# EAGLE board TUR8535 com mae - V1.01 (EAGLE 4.09)
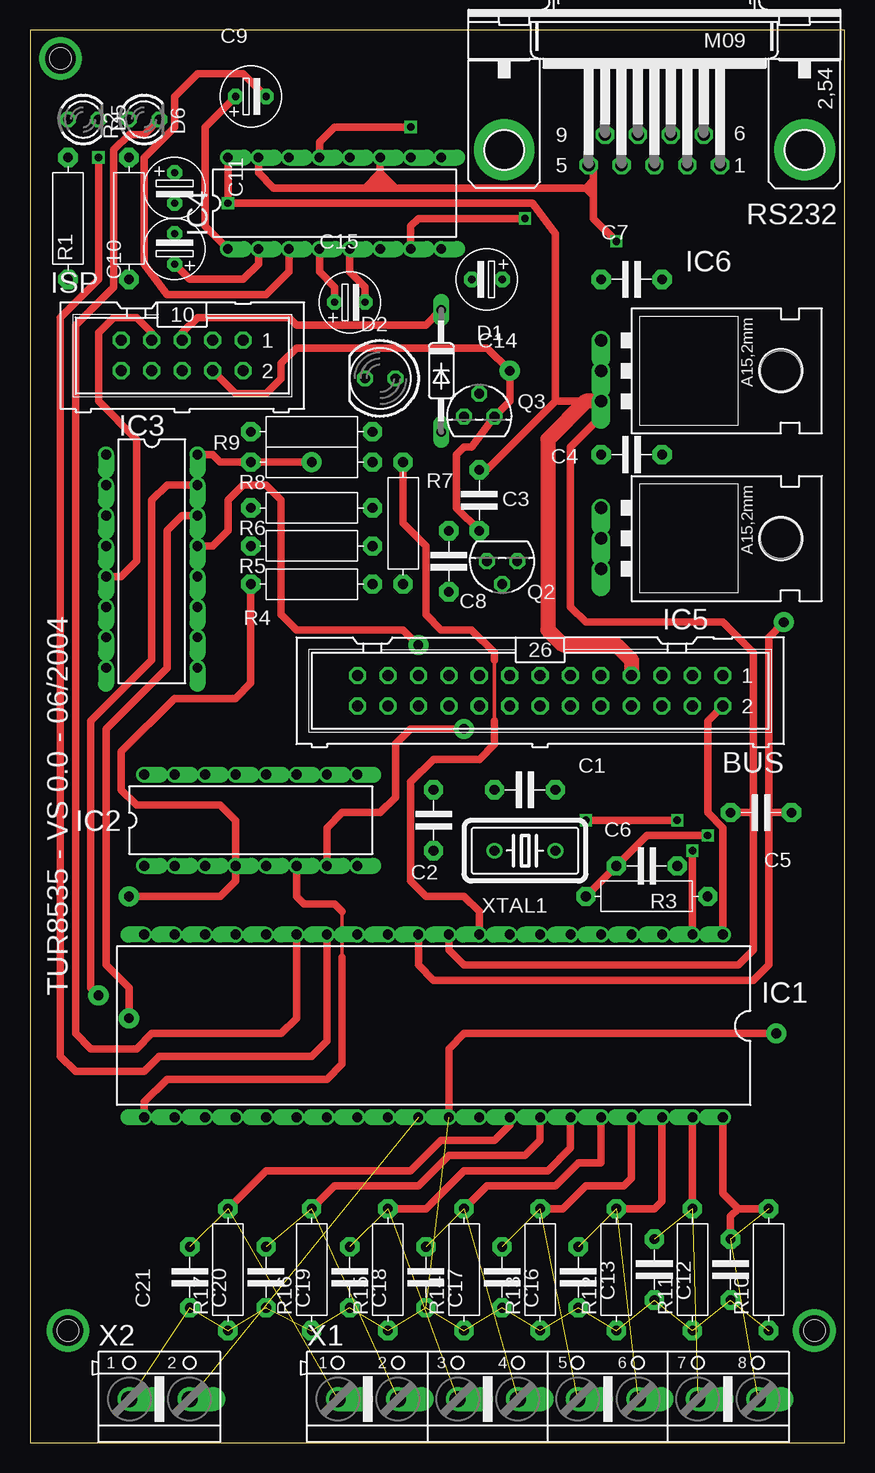
[diagram p0: board, top side]
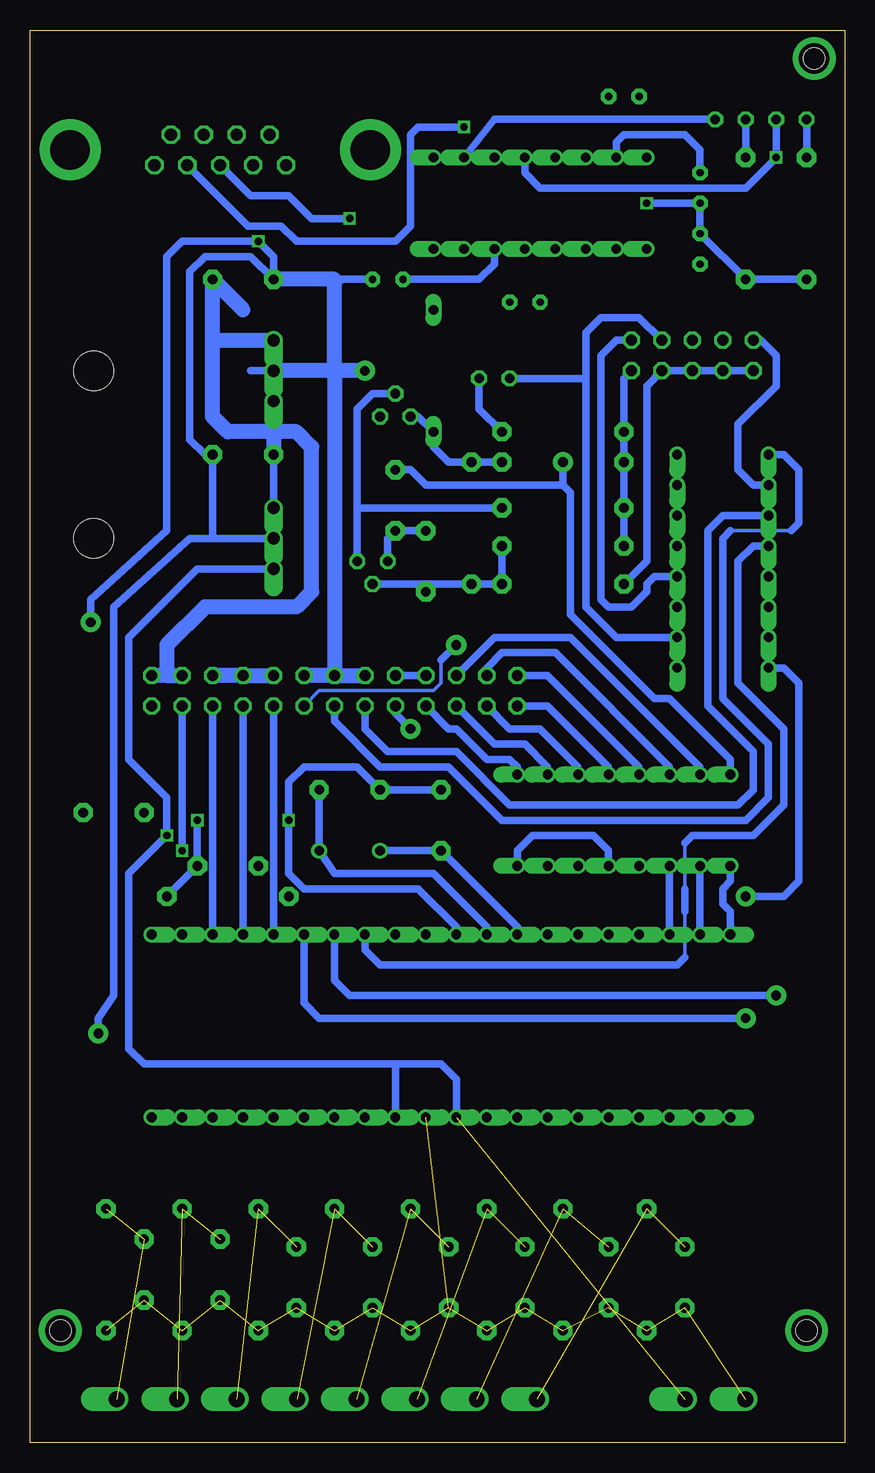
[diagram p1: board, bottom side, seen from below]

Size 67.92 x 117.78 mm. Coordinates in mm from the lower left corner, seen from the top.
Outline: 0,0 67.92,0 67.92,117.78 0,117.78 0,0
Copper layers used: Top, Bottom
Holes 1.78 mm at 2.53,115.41 3.17,9.36 65.4,9.36

## Footprints (pad centres in the part's own frame; a part is rotated, then mirrored left to right if it is on the bottom)
ML26 = drill 0.914 octagon: 1 -15.24,-1.27; 2 -15.24,1.27; 3 -12.7,-1.27; 4 -12.7,1.27; 5 -10.16,-1.27; 6 -10.16,1.27; 7 -7.62,-1.27; 8 -7.62,1.27; 9 -5.08,-1.27; 10 -5.08,1.27; 11 -2.54,-1.27; 12 -2.54,1.27; 13 0,-1.27; 14 0,1.27; 15 2.54,-1.27; 16 2.54,1.27; 17 5.08,-1.27; 18 5.08,1.27; 19 7.62,-1.27; 20 7.62,1.27; 21 10.16,-1.27; 22 10.16,1.27; 23 12.7,-1.27; 24 12.7,1.27; 25 15.24,-1.27; 26 15.24,1.27
C-5 = drill 0.813 pad 1.6 octagon: 1 -2.54,0; 2 2.54,0
ES-2,5L = drill 0.61 pad 1.27 octagon: 1 0,0; 2 2.54,0
DO35-10 = drill 0.813 long: A 5.08,0; C -5.08,0
LED5MM = drill 0.813 octagon: A -1.27,0; K 1.27,0
LED3MM = drill 0.813 octagon: A -1.27,0; K 1.27,0
DIL40 = drill 0.813 offset: 1 -24.13,-7.62; 2 -21.59,-7.62; 3 -19.05,-7.62; 4 -16.51,-7.62; 5 -13.97,-7.62; 6 -11.43,-7.62; 7 -8.89,-7.62; 8 -6.35,-7.62; 9 -3.81,-7.62; 10 -1.27,-7.62; 11 1.27,-7.62; 12 3.81,-7.62; 13 6.35,-7.62; 14 8.89,-7.62; 15 11.43,-7.62; 16 13.97,-7.62; 17 16.51,-7.62; 18 19.05,-7.62; 19 21.59,-7.62; 20 24.13,-7.62; 21 24.13,7.62; 22 21.59,7.62; 23 19.05,7.62; 24 16.51,7.62; 25 13.97,7.62; 26 11.43,7.62; 27 8.89,7.62; 28 6.35,7.62; 29 3.81,7.62; 30 1.27,7.62; 31 -1.27,7.62; 32 -3.81,7.62; 33 -6.35,7.62; 34 -8.89,7.62; 35 -11.43,7.62; 36 -13.97,7.62; 37 -16.51,7.62; 38 -19.05,7.62; 39 -21.59,7.62; 40 -24.13,7.62
DIL16 = drill 0.813 offset: 1 -8.89,-3.81; 2 -6.35,-3.81; 3 -3.81,-3.81; 4 -1.27,-3.81; 5 1.27,-3.81; 6 3.81,-3.81; 7 6.35,-3.81; 8 8.89,-3.81; 9 8.89,3.81; 10 6.35,3.81; 11 3.81,3.81; 12 1.27,3.81; 13 -1.27,3.81; 14 -3.81,3.81; 15 -6.35,3.81; 16 -8.89,3.81
78XXL = drill 1.016 offset: GND 0,-3.81; IN -2.54,-3.81; OUT 2.54,-3.81 | hole 3.302: 0,11.176
ML10 = drill 0.914 octagon: 1 -5.08,-1.27; 2 -5.08,1.27; 3 -2.54,-1.27; 4 -2.54,1.27; 5 0,-1.27; 6 0,1.27; 7 2.54,-1.27; 8 2.54,1.27; 9 5.08,-1.27; 10 5.08,1.27
TO92 = drill 0.813 octagon: 1 1.27,0; 2 0,1.905; 3 -1.27,0
R-10 = drill 0.813 pad 1.6 octagon: 1 -5.08,0; 2 5.08,0
M09HP = drill 1.016 octagon: 1 -5.486,1.27; 2 -2.743,1.27; 3 0,1.27; 4 2.743,1.27; 5 5.486,1.27; 6 -4.115,-1.27; 7 -1.372,-1.27; 8 1.372,-1.27; 9 4.115,-1.27 | drill 3.302 pad 5.08 round: G1 -12.522,0; G2 12.522,0
AK500/8 = drill 1.321 offset: 1 -17.526,0; 2 -12.497,0; 3 -7.518,0; 4 -2.489,0; 5 2.489,0; 6 7.518,0; 7 12.497,0; 8 17.526,0
AK500/2 = drill 1.321 offset: 1 -2.515,0; 2 2.515,0
HC18U-V = drill 0.813 round: 1 -2.54,0; 2 2.54,0

## Placement (x,y rotation side)
BUS  [ML26]  42.54,62.7 180 top
C1  27pF  [C-5]  41.27,54.44 0 top
C2  27pF  [C-5]  33.65,51.91 270 top
C3  100nF  [C-5]  34.92,73.5 270 top
C4  220nF  [C-5]  50.16,82.38 180 top
C5  100nF  [C-5]  60.95,52.54 180 top
C6  100nF  [C-5]  51.43,48.09 180 top
C7  220nF  [C-5]  50.16,96.99 0 top
C8  470nF  [C-5]  37.46,78.58 90 top
C9  10uFx16V  [ES-2,5L]  17.14,112.23 0 top
C10  10uFx16V  [ES-2,5L]  12.06,98.26 90 top
C11  10uFx16V  [ES-2,5L]  12.06,105.88 270 top
C12  [C-5]  58.41,14.44 90 top
C13  [C-5]  52.06,14.44 90 top
C14  10uFx16V  [ES-2,5L]  39.37,96.99 180 top
C15  10uFx16V  [ES-2,5L]  25.39,95.08 0 top
C16  [C-5]  45.71,13.8 90 top
C17  [C-5]  39.37,13.8 90 top
C18  [C-5]  33.02,13.8 90 top
C19  [C-5]  26.66,13.8 90 top
C20  [C-5]  19.68,13.8 90 top
C21  [C-5]  13.33,13.8 90 top
D1  1N4148  [DO35-10]  34.28,89.37 270 top
D2  [LED5MM]  29.2,88.73 180 top
D5  [LED3MM]  4.44,110.32 0 top
D6  [LED3MM]  9.52,110.32 0 top
IC1  AT90S8535P  [DIL40]  33.65,34.76 180 top
IC2  74LS138N  [DIL16]  18.41,51.91 0 top
IC3  4053N  [DIL16]  10.15,73.5 270 top
IC4  MAX232  [DIL16]  25.39,103.34 0 top
IC5  LM340T05  [78XXL]  51.43,75.4 270 top
IC6  LM340T05  [78XXL]  51.43,89.37 270 top
ISP  [ML10]  12.7,90.64 180 top
Q2  BC337  [TO92]  39.37,73.5 180 top
Q3  BC337  [TO92]  37.46,85.56 0 top
R1  150  [R-10]  3.17,102.07 270 top
R2  150  [R-10]  8.25,102.07 270 top
R3  470  [R-10]  51.43,45.55 180 top
R4  6.8k  [R-10]  23.49,71.59 0 top
R5  43k  [R-10]  23.49,74.77 180 top
R6  10k  [R-10]  23.49,77.94 180 top
R7  1M  [R-10]  31.11,76.67 90 top
R8  10k  [R-10]  23.49,81.75 180 top
R9  150  [R-10]  23.49,84.29 180 top
R10  [R-10]  61.59,14.44 90 top
R11  [R-10]  55.24,14.44 90 top
R12  [R-10]  48.89,14.44 90 top
R13  [R-10]  42.54,14.44 90 top
R14  [R-10]  36.19,14.44 90 top
R15  [R-10]  29.84,14.44 90 top
R16  [R-10]  23.49,14.44 90 top
R17  [R-10]  16.5,14.44 90 top
RS232  [M09HP]  52.06,107.78 180 top
X1  [AK500/8]  43.17,3.64 0 top
X2  [AK500/2]  10.79,3.64 0 top
XTAL1  4MHz  [HC18U-V]  41.27,49.36 180 top

## Library data of the parts
BUS ISP = con-harting-ml
C1-C21 R1-R17 = discrete
D1 = diode
D2 D5 D6 = led
IC1 = atmel
IC2 = 74xx-eu
IC3 = 40xx
IC4 = maxim
IC5 IC6 = v-reg
Q2 Q3 = transistor-npn
RS232 = con-subd
X1 X2 = con-ptr500
XTAL1 = crystal

## Nets
(MISO)PB6: IC1.7 IC3.15
(MOSI)PB5: IC1.6 IC3.14
(SCK)PB7: IC1.8 IC3.4
+5V: BUS.5 BUS.7 BUS.9 C5.2 C8.2 C10.2 C11.2 IC1.10 IC2.16 IC3.16 IC4.16 IC6.OUT ISP.2 R1.2 R2.2 R5.2 R6.2 R8.2 R9.2
+12V: BUS.1 BUS.3 C4.2 C7.2 IC5.IN IC6.IN
-12V: BUS.17 BUS.19
ADDR0: BUS.21 IC2.15
ADDR1: BUS.23 IC2.14
ADDR2: BUS.25 IC2.13
ADDR3: BUS.26 IC2.12
ADDR4: BUS.24 IC2.11
ADDR5: BUS.22 IC2.10
ADDR6: BUS.20 IC2.9
ADDR7: BUS.18 IC2.7
AREF: C6.2 IC1.30 IC1.32 IC5.OUT R3.2 X2.2
CLK1: C2.2 IC1.13 XTAL1.2
CLK2: C1.2 IC1.12 XTAL1.1
LED_ENABLE: D2.K IC3.9 IC3.10 IC3.11 ISP.3
MISO: IC3.2 ISP.9
MOSI: IC3.12 ISP.1
N$2: C10.1 IC4.2
N$3: C14.2 IC4.6
N$7: Q2.3 Q3.2 R6.1
N$9: C3.2 Q2.2 R4.2 R5.1 R7.1
N$11: C15.2 IC4.5
N$13: C15.1 IC4.4
N$14: C9.2 IC4.3
N$15: C9.1 IC4.1
N$16: C12.2 IC1.40 R10.2 X1.8
N$19: D2.A R9.1
N$20: D5.A R1.1
N$21: D6.A R2.1
N$22: C13.2 IC1.39 R11.2 X1.7
N$23: C16.2 IC1.38 R12.2 X1.6
N$24: C18.2 IC1.36 R14.2 X1.4
N$25: C20.2 IC1.34 R16.2 X1.2
N$26: C21.2 IC1.33 R17.2 X1.1
N$29: C17.2 IC1.37 R13.2 X1.5
N$31: C19.2 IC1.35 R15.2 X1.3
P-RESET: D1.C ISP.5
PB0: BUS.2 IC1.1
PB1: BUS.4 IC1.2
PB2: BUS.6 IC1.3
PB3: BUS.8 IC1.4
PB4: BUS.10 IC1.5
PB5: BUS.12 IC3.13
PB6: BUS.14 IC3.1
PB7: BUS.16 IC3.3
PD0: D5.K IC1.14 IC4.12
PD1: D6.K IC1.15 IC4.10
PD2: IC1.16
PD3: IC1.17
PD4: IC1.18 IC2.3
PD5: IC1.19 IC2.2
PD6: IC1.20 IC2.1
PD7: IC1.21 IC2.6
PE: BUS.11 BUS.13 BUS.15 C1.1 C2.1 C3.1 C4.1 C5.1 C6.1 C7.1 C8.1 C11.1 C12.1 C13.1 C14.1 C16.1 C17.1 C18.1 C19.1 C20.1 C21.1 IC1.11 IC1.31 IC2.4 IC2.5 IC2.8 IC3.6 IC3.7 IC3.8 IC4.11 IC4.15 IC5.GND IC6.GND ISP.4 ISP.6 ISP.8 ISP.10 Q2.1 Q3.1 R3.1 R4.1 R10.1 R11.1 R12.1 R13.1 R14.1 R15.1 R16.1 R17.1 RS232.5 X2.1
RST: D1.A IC1.9 Q3.3 R7.2 R8.1
RX: IC4.13 RS232.2
SCK: IC3.5 ISP.7
TX: IC4.7 RS232.3

## Tracks (layer width: path | path; a pad name or v marks a point on that pad's centre or on a via)
(MISO)PB6  (via drill 0.81 pad 1.68)
  Top 0.61: v5.71,37.3 5.08,37.94 5.08,60.16 10.15,65.24 10.15,78.58 11.42,79.84 IC3.15
  Bottom 0.61: IC1.7 42.54,38.57 41.27,37.3 v5.71,37.3
(MOSI)PB5  (via drill 0.81 pad 1.68)
  Top 0.61: v8.25,35.39 8.25,37.94 6.35,39.84 6.35,59.52 11.42,64.61 11.42,76.03 12.7,77.3 IC3.14
  Bottom 0.61: IC1.6 45.08,36.66 43.81,35.39 v8.25,35.39
(SCK)PB7
  Bottom 0.305: 13.33,46.19 13.33,50 | 13.33,40.47 13.33,44.28
  Bottom 0.61: IC1.8 40,41.11 38.73,39.84 13.96,39.84 13.33,40.47 | 13.33,50 12.7,50.64 7.62,50.64 5.08,53.17 5.08,59.52 8.88,63.33 8.88,73.5 7.62,74.77 IC3.4 | 13.33,44.28 13.33,46.19
+5V  (via drill 0.61, 0.81 pad 1.68)
  Top 0.61: IC3.16 15.23,82.38 15.87,81.75 R8.2 v23.49,81.75 | IC1.10 34.92,41.11 36.19,39.84 59.05,39.84 60.32,41.11 60.32,52.54 | 60.32,52.54 60.32,65.88 57.78,68.41 46.35,68.41 45.08,69.69 45.08,83.02 47.62,85.56 IC6.OUT 43.81,86.83 | C8.2 38.09,81.11 43.81,86.83 | 60.32,52.54 C5.2 | 43.81,86.83 43.81,100.8 41.91,103.34 v16.5,103.34 IC4.16
  Top 1.27: IC6.OUT 46.35,86.83 43.17,83.66 43.17,67.78 44.45,66.51 48.89,66.51 50.16,65.24 BUS.7
  Bottom 0.61: R5.2 R6.2 R8.2 R9.2 18.41,88.73 ISP.2 | IC2.16 9.52,56.98 14.6,62.06 15.87,62.06 22.86,69.05 22.86,79.21 23.49,79.84 | 23.49,79.84 34.92,79.84 36.19,81.11 C8.2 | 23.49,79.84 v23.49,81.75 | R1.2 R2.2 C10.2 C11.2 v16.5,103.34
  Bottom 1.27: BUS.9 BUS.7 BUS.5
+12V
  Bottom 0.61: C4.2 IC5.IN
  Bottom 1.27: 56.51,63.97 BUS.3 | 56.51,63.97 BUS.1 | 52.7,91.91 52.7,85.56 51.43,84.29 47.62,84.29 | 52.7,91.91 C7.2 50.16,94.45 | 47.62,84.29 C4.2 | 52.7,91.91 IC6.IN | 56.51,63.97 56.51,66.51 53.34,69.69 45.71,69.69 44.45,70.95 44.45,83.02 45.71,84.29 47.62,84.29
-12V
  Bottom 0.61: BUS.19 BUS.17
ADDR0
  Bottom 0.61: IC2.15 12.06,56.35 22.86,67.14 29.2,67.14 BUS.21
ADDR1
  Bottom 0.61: IC2.14 14.6,56.35 24.12,65.88 28.57,65.88 29.84,64.61 BUS.23
ADDR2
  Bottom 0.61: IC2.13 17.14,56.35 24.76,63.97 BUS.25
ADDR3
  Bottom 0.61: IC2.12 19.68,56.35 24.76,61.43 BUS.26
ADDR4
  Bottom 0.61: IC2.11 22.22,56.35 25.39,59.52 27.93,59.52 BUS.24
ADDR5
  Bottom 0.61: IC2.10 24.76,56.35 26.66,58.25 29.2,58.25 BUS.22
ADDR6
  Bottom 0.61: IC2.9 27.3,56.35 27.93,56.98 29.84,56.98 32.38,59.52 33.02,59.52 BUS.20
ADDR7  (via drill 0.81 pad 1.68)
  Top 0.61: IC2.7 24.76,51.27 26.03,52.54 29.2,52.54 30.47,53.81 30.47,58.25 31.74,59.52 v36.19,59.52
  Bottom 0.61: v36.19,59.52 37.46,60.8 BUS.18
AREF  (via drill 0.61)  (1 unrouted)
  Top 0.61: R3.2 C6.2 51.43,50.64 v56.51,50.64
  Bottom 0.61: IC5.OUT 53.97,72.86 59.69,67.14 59.69,56.98 56.51,53.81 v56.51,50.64 59.69,47.46 59.69,32.85 58.41,31.59 37.46,31.59 | IC1.30 32.38,30.31 33.65,31.59 37.46,31.59 | 37.46,31.59 IC1.32
CLK1
  Bottom 0.61: XTAL1.2 C2.2 27.3,43.02 IC1.13
CLK2
  Bottom 0.61: C1.2 XTAL1.1 42.54,47.46 34.28,47.46 29.84,43.02 IC1.12
LED_ENABLE
  Bottom 0.61: IC3.9 IC3.10 | IC3.10 IC3.11 | IC3.10 19.04,67.14 21.59,69.69 21.59,88.73 | 21.59,88.73 21.59,92.55 20.31,93.81 17.14,93.81 ISP.3 | 21.59,88.73 D2.K
MISO
  Bottom 0.61: IC3.2 7.62,79.84 8.88,81.11 8.88,84.92 5.71,88.1 5.71,90.64 6.98,91.91 ISP.9
MOSI
  Bottom 0.61: ISP.1 19.04,91.91 20.31,90.64 20.31,70.32 19.68,69.69 17.77,69.69 16.5,70.95 16.5,71.59 15.87,72.22 IC3.12
N$1  (via drill 2.54)
  other vias: 2.53,115.41
N$2
  Top 0.61: IC4.2 19.04,98.26 17.77,96.99 13.33,96.99 C10.1
N$3
  Bottom 0.61: IC4.6 29.2,98.26 30.47,96.99 C14.2
N$4  (via drill 2.54)
  other vias: 3.17,9.36
N$5  (via drill 2.54)
  other vias: 65.4,9.36
N$7
  Bottom 0.61: 40.63,77.94 Q2.3 | R6.1 40.63,77.94 | Q3.2 39.37,87.46 40.63,86.19 40.63,77.94
N$9
  Bottom 0.61: 34.92,71.59 R7.1 R4.2 R5.1 | 34.92,71.59 C3.2 | 34.92,71.59 Q2.2
N$11
  Top 0.61: C15.2 27.93,96.35 26.66,97.62 IC4.5
N$13
  Top 0.61: C15.1 25.39,96.35 24.12,97.62 IC4.4
N$14
  Top 0.61: IC4.3 21.59,97.62 19.68,95.72 11.42,95.72 9.52,98.26 9.52,107.15 12.06,109.69 12.06,112.23 13.96,114.13 17.77,114.13 C9.2
N$15
  Top 0.61: IC4.1 14.6,101.43 14.6,109.69 C9.1
N$16  (2 unrouted)
  Top 0.61: C12.2 58.41,18.88 59.05,19.52 | R10.2 59.05,19.52 | 59.05,19.52 57.78,20.79 IC1.40
N$19
  Bottom 0.61: R9.1 30.47,86.19 D2.A
N$20
  Bottom 0.61: R1.1 D5.A
N$21
  Bottom 0.61: R2.1 D6.A
N$22  (2 unrouted)
  Top 0.61: R11.2 IC1.39
N$23  (2 unrouted)
  Top 0.61: IC1.38 52.7,20.15 52.06,19.52 R12.2
N$24  (2 unrouted)
  Top 0.61: IC1.36 47.62,23.33 45.71,23.33 43.81,21.42 38.09,21.42 R14.2
N$25  (2 unrouted)
  Top 0.61: IC1.34 42.54,25.23 41.27,23.96 34.92,23.96 32.38,21.42 25.39,21.42 R16.2
N$26  (2 unrouted)
  Top 0.61: IC1.33 40,26.5 38.73,25.23 34.28,25.23 31.74,22.7 19.68,22.7 R17.2
N$29  (2 unrouted)
  Top 0.61: IC1.37 50.16,22.06 49.52,21.42 46.35,21.42 44.45,19.52 R13.2
N$31  (2 unrouted)
  Top 0.61: IC1.35 45.08,24.6 43.17,22.7 36.19,22.7 33.02,19.52 R15.2
P-RESET
  Top 0.61: D1.C 33.02,93.18 22.22,93.18 21.59,93.81 13.96,93.81 12.7,92.55 ISP.5
PB0
  Top 0.61: IC1.1 57.78,51.27 56.51,52.54 56.51,60.16 BUS.2
PB1  (via drill 0.61)
  Top 0.61: IC1.2 v55.24,49.36
  Bottom 0.61: v55.24,49.36 BUS.4
PB2
  Bottom 0.61: IC1.3 BUS.6
PB3
  Bottom 0.61: IC1.4 BUS.8
PB4
  Bottom 0.61: IC1.5 BUS.10
PB5  (via drill 0.81 pad 1.68)
  Top 0.61: v32.38,66.51 31.11,67.78 22.22,67.78 20.95,69.05 20.95,78.58 19.68,79.84 17.77,79.84 16.5,78.58 16.5,76.03 15.23,74.77 IC3.13
  Bottom 0.305: BUS.12 43.81,62.7 34.28,62.7 33.65,63.33 33.65,65.24
  Bottom 0.61: v32.38,66.51 33.65,65.24
PB6
  Bottom 0.305: 9.52,76.03 4.44,76.03
  Bottom 0.61: BUS.14 42.54,60.16 38.73,56.35 33.02,56.35 28.57,51.91 8.25,51.91 6.35,53.81 6.35,58.25 10.15,62.06 10.15,75.4 9.52,76.03 | IC3.1 5.08,82.38 3.81,81.11 3.81,76.67 4.44,76.03
PB7
  Bottom 0.61: BUS.16 40,59.52 38.09,57.62 32.38,57.62 27.93,53.17 8.88,53.17 7.62,54.44 7.62,57.62 11.42,61.43 11.42,76.03 10.15,77.3 IC3.3
PD0  (via drill 0.61)
  Top 0.61: IC1.14 24.76,33.49 23.49,32.22 10.79,32.22 9.52,30.95 3.81,30.95 2.53,32.22 2.53,93.81 5.71,96.99 v5.71,107.15
  Bottom 0.61: D5.K v5.71,107.15 8.25,104.61 25.39,104.61 26.66,105.88 IC4.12
PD1
  Top 0.61: IC1.15 22.22,35.39 20.95,34.12 10.15,34.12 8.88,32.85 5.08,32.85 3.81,34.12 3.81,93.18 6.98,96.35 6.98,107.78 8.25,109.05 9.52,109.05 D6.K
  Bottom 0.61: D6.K 29.2,110.32 IC4.10
PD4
  Bottom 0.61: IC1.18 IC2.3
PD5
  Bottom 0.61: IC1.19 IC2.2
PD6
  Bottom 0.61: IC1.20 9.52,44.28 10.15,44.92 10.15,46.19 9.52,46.83 IC2.1
PD7
  Top 0.305: 26.03,40.47 26.03,44.28
  Top 0.61: IC1.21 9.52,28.41 11.42,30.31 24.76,30.31 26.03,31.59 26.03,40.47 | 26.03,44.28 25.39,44.92 22.86,44.92 22.22,45.55 IC2.6
PE  (via drill 0.61, 0.81 pad 1.68)  (17 unrouted)
  Top 0.61: C8.1 35.55,77.94 35.55,82.38 36.19,83.02 36.83,83.02 Q3.1 40,86.83 v40,89.37 38.09,91.27 22.22,91.27 20.95,90 20.95,88.73 19.68,87.46 17.14,87.46 ISP.4 | IC1.11 32.38,39.84 33.65,38.57 60.32,38.57 61.59,39.84 61.59,52.54 | 61.59,52.54 61.59,67.14 v62.86,68.41 | R4.1 18.41,63.33 17.14,62.06 12.06,62.06 7.62,57.62 7.62,54.44 8.88,53.17 15.87,53.17 17.14,51.91 IC2.4 17.14,46.83 15.87,45.55 v8.25,45.55 | v62.23,34.12 36.19,34.12 34.92,32.85 IC1.31 | 61.59,52.54 C5.1 | v46.35,51.91 v53.97,51.91 | IC4.15 19.04,105.88 20.31,104.61 27.93,104.61 | 29.2,105.88 27.93,104.61 | 29.2,105.88 IC4.11 | v48.89,100.16 46.98,102.07 46.98,103.97 | 46.98,103.97 46.98,104.61 | 46.98,104.61 46.98,105.24 | 46.98,104.61 46.35,104.61 | 46.35,104.61 30.47,104.61 | 46.35,104.61 46.98,105.24 | 46.98,103.97 46.35,104.61 | 30.47,104.61 29.2,105.88 | 30.47,104.61 29.84,104.61 | 29.84,104.61 27.93,104.61 | 27.93,104.61 29.2,105.24 29.84,104.61 | RS232.5 46.98,106.52 46.98,105.24
  Bottom 0.61: C2.1 C1.1 40.63,56.35 45.08,56.35 46.35,55.08 v46.35,51.91 46.35,47.46 45.08,46.19 35.55,46.19 32.38,43.02 IC1.11 | IC2.8 27.3,49.36 26.03,50.64 20.95,50.64 19.68,49.36 IC2.5 IC2.4 | IC3.6 IC3.7 IC3.8 5.08,64.61 3.81,63.33 3.81,46.83 5.08,45.55 v8.25,45.55 | R4.1 16.5,73.5 16.5,88.1 ISP.4 ISP.6 ISP.8 ISP.10 | 52.7,75.4 54.6,75.4 60.95,69.69 60.95,37.3 62.23,35.39 v62.23,34.12 | 52.7,75.4 IC5.GND | IC6.GND 49.52,89.37 | 52.7,75.4 C4.1 53.34,82.38 54.6,83.66 54.6,97.62 53.34,98.89 49.52,98.89 C7.1 47.62,98.89 v48.89,100.16 55.24,100.16 56.51,98.89 56.51,76.03 62.86,70.32 v62.86,68.41 | C3.1 C8.1 38.09,75.4 Q2.1 | R3.1 C6.1 v53.97,51.91 | IC4.15 19.04,108.42 18.41,109.05 13.33,109.05 12.06,107.78 C11.1 | 42.54,96.99 41.91,96.99 | 42.54,96.35 41.91,96.99 | 41.91,96.99 C14.1
  Bottom 1.27: BUS.13 BUS.11 | BUS.13 BUS.15 | 42.54,89.37 BUS.13 | 42.54,89.37 IC6.GND | 42.54,89.37 42.54,96.35 42.54,96.99 C7.1 | v40,89.37 42.54,89.37
RST
  Top 0.305: 38.73,60.16 38.73,65.24
  Top 0.61: IC1.9 37.46,44.28 36.19,45.55 33.02,45.55 31.74,46.83 31.74,55.08 33.65,56.98 37.46,56.98 38.73,58.25 38.73,60.16 | 38.73,65.24 38.73,65.88 36.83,67.78 34.28,67.78 33.02,69.05 33.02,74.77 31.11,76.67 R7.2
  Bottom 0.61: R8.1 R7.2 33.02,81.75 34.28,83.02 D1.A 35.55,85.56 Q3.3
RX  (via drill 0.61)
  Top 0.61: IC4.13 24.12,108.42 25.39,109.69 v31.74,109.69
  Bottom 0.61: RS232.2 49.73,101.43 46.98,101.43 45.71,100.16 37.46,100.16 36.19,101.43 36.19,109.05 35.55,109.69 v31.74,109.69
SCK
  Top 0.61: ISP.7 10.15,92.55 8.88,93.81 6.98,93.81 5.71,92.55 5.71,86.83 8.88,83.66 8.88,73.5 7.62,72.22 IC3.5
TX  (via drill 0.61)
  Top 0.61: IC4.7 31.74,101.43 32.38,102.07 v41.27,102.07
  Bottom 0.61: RS232.3 49.52,103.97 46.35,103.97 44.45,102.07 v41.27,102.07

## Text on the board
tPlace: TUR8535 - VS 0.0 - 06/2004